# Altium PCB ChildBoardV2.PcbDoc
Units mil, origin at the board's own origin, x right, y up, seen from the top; angles counter-clockwise.
Board outline 460 x 650 mil, 2 copper layers (Top Layer, Bottom Layer); 6 components, 4 nets, 26 pads, 10 vias.
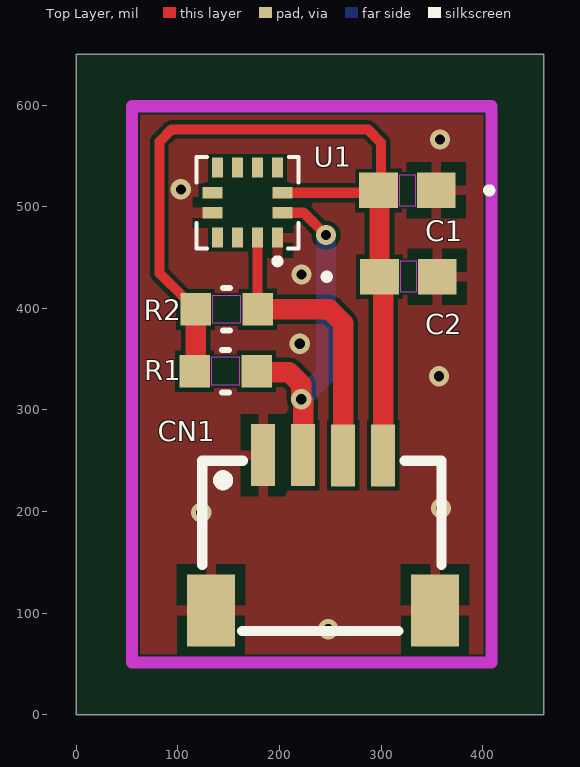
[diagram p0: Top Layer view]
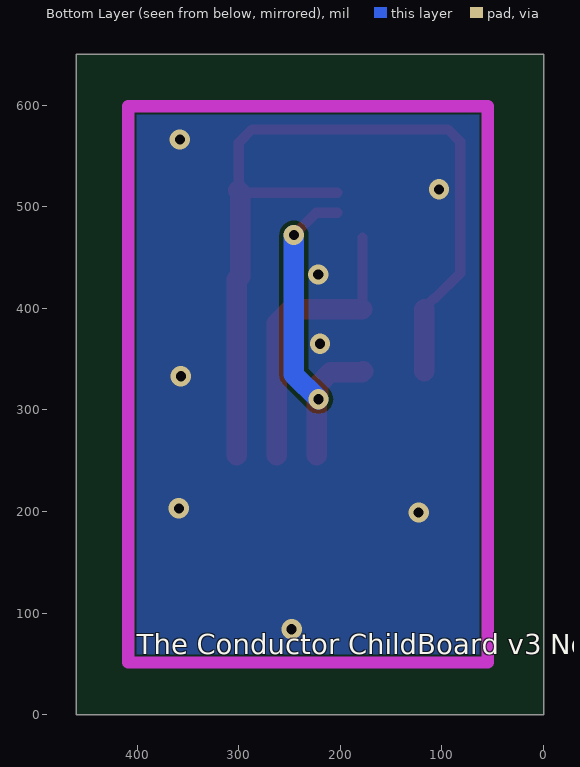
[diagram p1: Bottom Layer view, seen from below]
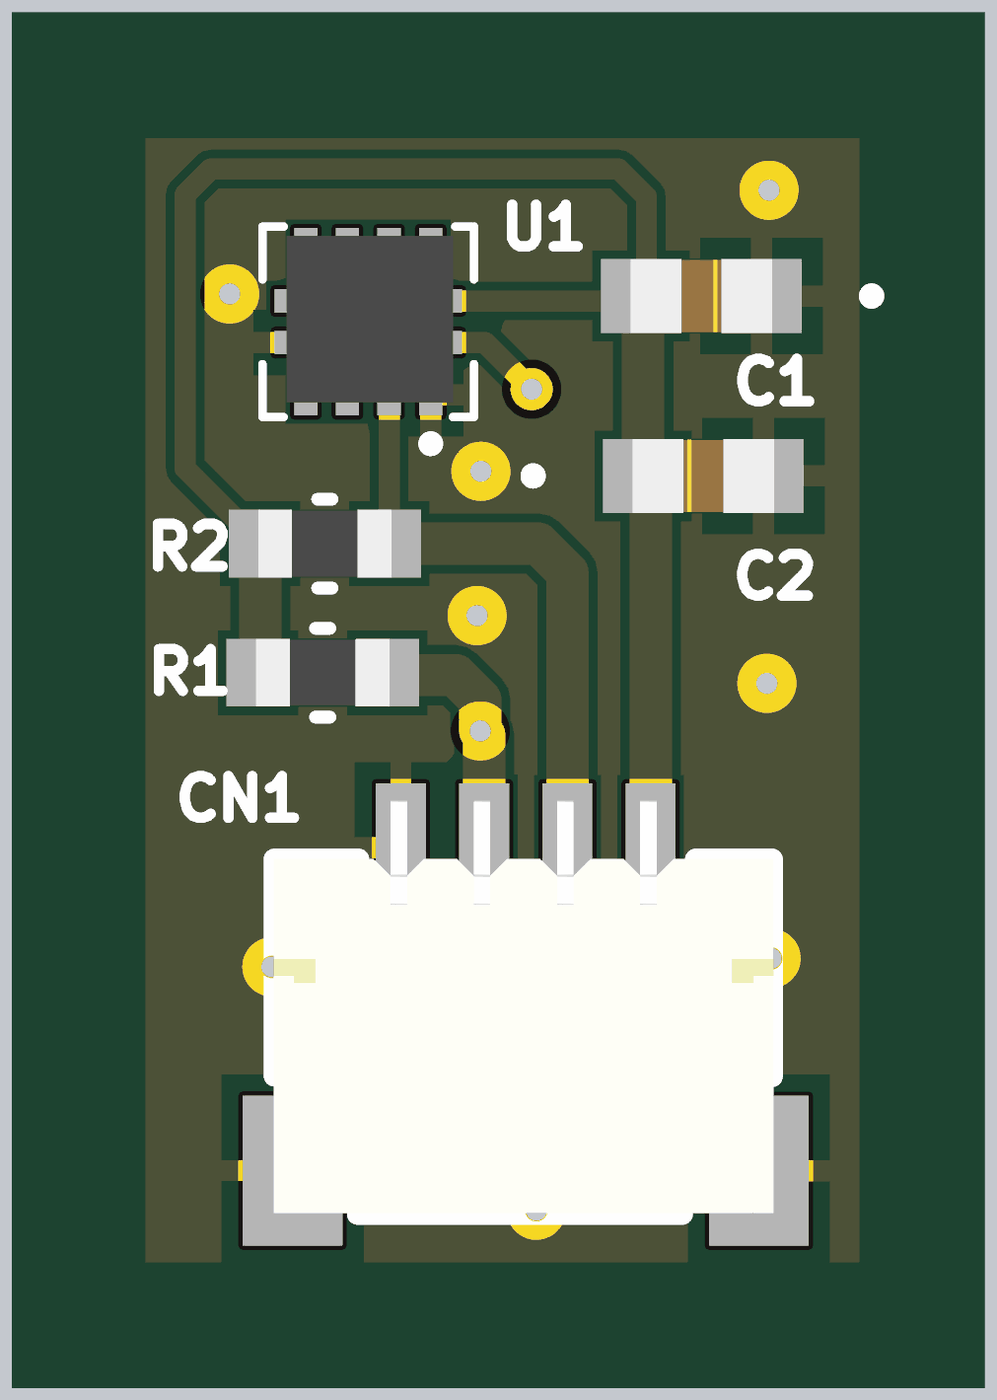
[diagram p2: 3D render of the assembled board from above, using the file's embedded part models]

## Layer stack, top to bottom
Top Solder: solder mask 0.4, Solder Resist, Dk 3.5
Top Layer: signal copper 1.4
Dielectric 1: dielectric 12.6, FR-4, Dk 4.8
Bottom Layer: signal copper 1.4
Bottom Solder: solder mask 0.4, Solder Resist, Dk 3.5

## Board outline
0,0 460,0 460,650 0,650

## Design rules (kind name [scope] priority, off if disabled: settings)
Clearance Clearance_KeepOut [IsKeepOut] p1: gap=2 ignorepadtopadclearanceinfootprint=FALSE
Clearance [All] p2: gap=4 ignorepadtopadclearanceinfootprint=FALSE
MinimumSolderMaskSliver [All] p1: minsoldermaskwidth=0.1
PolygonConnect via [InNet('GND') vs IsVia] p1: connectstyle=Direct reliefconductorwidth=10 reliefentries=4 polygonreliefangle="90 Angle" airgapwidth=10
PolygonConnect [All] p2: connectstyle=Relief reliefconductorwidth=10 reliefentries=4 polygonreliefangle="90 Angle" airgapwidth=10
RoutingVias [All] p1: holewidth=25 width=50 viastyle="Through Hole" minholewidth=25 minwidth=50 maxholewidth=25 maxwidth=50
SilkToSolderMaskClearance [IsPad] p1: minsilkscreentomaskgap=0.1 clearancetoexposedcopper=TRUE
SolderMaskExpansion [All] p1: expansion=4 istentingtop=FALSE
Width [All] p1: maxlimit=20 minlimit=10 preferedwidth=10 minimp=50.000000 maximp=50.000000 favimp=50.000000
28 further rules are at their usual default settings.

## Components (designator, comment, footprint, x,y, rotation, side; value= is the part's Value field where it differs from the comment)
C1 "0.1 uF" CAP_AMK107BJ475MK-T_TAY 326,516 r180 top
C2 "0.1uF" CAP_AMK107BJ475MK-T_TAY 327,431 r0 top
CN1 "4 pin connector" "CONN-SMD_4P-P1.00_SM04B-SRSS-TB-LF-SN - duplicate" 243,179 r0 top
R1 "4.7K" RC0603N_YAG 147,338 r0 top
R2 "4.7K" RC0603N_YAG 148,399 r0 top
U1 "MC3416-P" "LGA-12_L2.0-W2.0-P0.50-BL - duplicate" 168.55,504.52 r180 top

## Footprints (in the part's own frame and the unit in brackets; to place one, negate y for a bottom-side part, rotate by r counter-clockwise, add the part's x,y. Pads: shape width x height; smd on the part's side, far side on the other; paste and mask are expansions set on the pad)
CAP_AMK107BJ475MK-T_TAY [mil]
  rect 38x35 smd paste+0 mask+0: 1(-28.5,0) 2(28.5,0)
  Top Layer keep-out region: -7.5,-15.5 -7.5,15.5 7.5,15.5 7.5,-15.5
  silkscreen extent -84,-3 -78,3, body extent -34,-17 34,17, height 20
"CONN-SMD_4P-P1.00_SM04B-SRSS-TB-LF-SN - duplicate" [mm]
  rect 0.6x1.55 smd paste+0 mask+0.051: 1(-1.5,1.938) 2(-0.5,1.938) 3(0.501,1.938) 4(1.5,1.938)
  rect 1.2x1.8 smd paste+0 mask+0.051: 5(2.8,-1.938) 6(-2.8,-1.938)
  silkscreen extent -3.02,-2.46 2.96,1.8, body extent -3.03,-2.45 2.97,2.5, height 3.28
"LGA-12_L2.0-W2.0-P0.50-BL - duplicate" [mm]
  rect 0.28x0.5 smd paste+0 mask+0.051: 1(-0.75,0.892) 4(-0.75,-0.858) 5(-0.25,-0.858) 6(0.25,-0.858) 7(0.75,-0.858) 10(0.75,0.892) 11(0.25,0.892) 12(-0.25,0.892)
  rect 0.5x0.28 smd paste+0 mask+0.051: 2(-0.875,0.267) 3(-0.875,-0.233) 8(0.875,-0.233) 9(0.875,0.267)
  silkscreen extent -1.27,-1.13 1.27,1.56, body extent -1.02,-1.01 0.98,0.99, height 0.92
RC0603N_YAG [mil]
  rect 30x32 smd paste+0 mask+0: 1(-30.5,0) 2(30.5,0)
  Top Layer keep-out region: -13.5,-14 -13.5,14 13.5,14 13.5,-14
  silkscreen extent -3,-21 3,21, body extent -31,-16 31,16, height 28

## Part data
C1 C2: library part CL10B104KB8NNNC, "SMT Capacitor 0.1 uF", LCSC PART #=C1591, Manufacturer_Part_Number=AMK107BJ475MK-T, Mfr_Name="Taiyo Yuden", Copyright="Copyright (C) 2023 Ultra Librarian. All rights reserved.", Digi-Key_Part_Number_1=587-2228-1-ND, Digi-Key_Part_Number_2=587-2228-2-ND, Digi-Key_Part_Number_3=587-2228-6-ND, RefDes=RefDes, Type=DEV
CN1: library part "SM04B-SRSS-TB (LF)(SN)", JLCPCB Part Class="Extended Part", LCSC PART #=C160404, Manufacturer=JST, Manufacturer Part=SM04B-SRSS-TB(LF)(SN), Contributor=LCSC, spicePre=C, spiceSymbolName="SM04B-SRSS-TB (LF)(SN)", Supplier=LCSC, Supplier Part=C160404
R1 R2: library part RC0603JR-074K7L, "SMT Resitor 4.7k", LCSC PART #=C105428, Manufacturer_Part_Number=RC0603JR-072K7L, Mfr_Name=Yageo, Copyright="Copyright (C) 2023 Ultra Librarian. All rights reserved.", Digi-Key_Part_Number_1=311-2.7KGRCT-ND, Digi-Key_Part_Number_2=311-2.7KGRDKR-ND, Digi-Key_Part_Number_3=311-2.7KGRTR-ND, Digi-Key_Part_Number_4=311-2.7KGRTR-NDL, RefDes=RefDes, Type=DEV
U1: "VLGA-12 Attitude Sensor/Gyroscope ROHS", LCSC PART #=C5250287

## Via types
v1: diameter 20, hole 10, Top Layer to Bottom Layer, 10 vias

## Nets (pads, with @x,y where several pads share a name; then routed paths per layer and width w, separated by ;. In a path a pad name is that pad's centre, name@x,y a point inside that pad or via, vN(x,y) a via of type N, cw(c..) or ccw(c..) an arc to the next point about the centre after c; other vN are vias at no path point)
+3.3V: C1.2 C2.1 CN1.4 R1.1 R2.1 U1.3 | length 876.5
  Top Layer w10: R2.1 117.5,400 107.5,410 106.5,410 82,434.5 82,564 94,576 286.98,576 300.05,562.93 300.05,515.55 C1.2@300.05,514.52 ; U1.3 295.19,513.69 C1.2
  Top Layer w20: R1.1@117.5,338 R2.1 ; C2.1 298.5,514 300.05,515.55 C1.2@300.5,516 ; C2.1@299.28,431.22 302.07,428.43 CN1.4
GND: C1.1 C2.2 CN1.1 CN1.5 CN1.6 U1.1 U1.9
  other v1: 248,84 123,199 359,203 357,333 220,365 221.78,433.18 103,517 358,566
SC: CN1.3 R2.2 U1.12 | length 292.3
  Top Layer w10: R2.2@178.39,399.11 U1.12 ; R2.2@187.39,400.99 R2.2@187.39,401.1 ; CN1.3 CN1.3@264,256.57
  Top Layer w20: R2.2@178.39,399.11 R2.2 249,399 262.7,385.3 CN1.3
SD: CN1.2 R1.2 U1.2 | length 340.8
  Top Layer w10: U1.2 223.78,494 v1(245.78,472)
  Top Layer w20: R1.2 178.63,336.87 209.8,336.87 221.51,325.16 v1(221.51,310.49) ; CN1.2 v1@223.32,308.68
  Bottom Layer w20: v1(221.51,310.49) 245.78,334.76 v1(245.78,472)
pads on no net: U1.4 U1.5 U1.6 U1.7 U1.8 U1.10 U1.11

## Polygon pours and split planes (outlines as drawn)
GND on Bottom Layer "GND_L02_P001" (solid, pour order 1): 62,59 402,59 402,591 61,591
GND on Top Layer "GND_L01_P000" (solid, pour order 0): 63.23,591 400.92,591 402.95,59 61.21,59

## Keep-outs
Keep-Out Layer:
  lines w12: 55,51.18 55,598.82 408.82,598.82 408.82,51.18 55,51.18

## Silkscreen, mask and mechanical layers (free items; w line width, h text height)
Bottom Overlay:
  text "The Conductor ChildBoard v3 Nov2023" at 400.66,59.34 h19.68